# Altium PCB V1 RING BAND.PcbDoc
Units mil, origin at the board's own origin, x right, y up, seen from the top; angles counter-clockwise.
Board outline 1102.36 x 354.33 mil, 2 copper layers (Top Layer, Bottom Layer), stack 13.315 mil thick; 15 components, 12 nets, 52 pads, 16 vias.
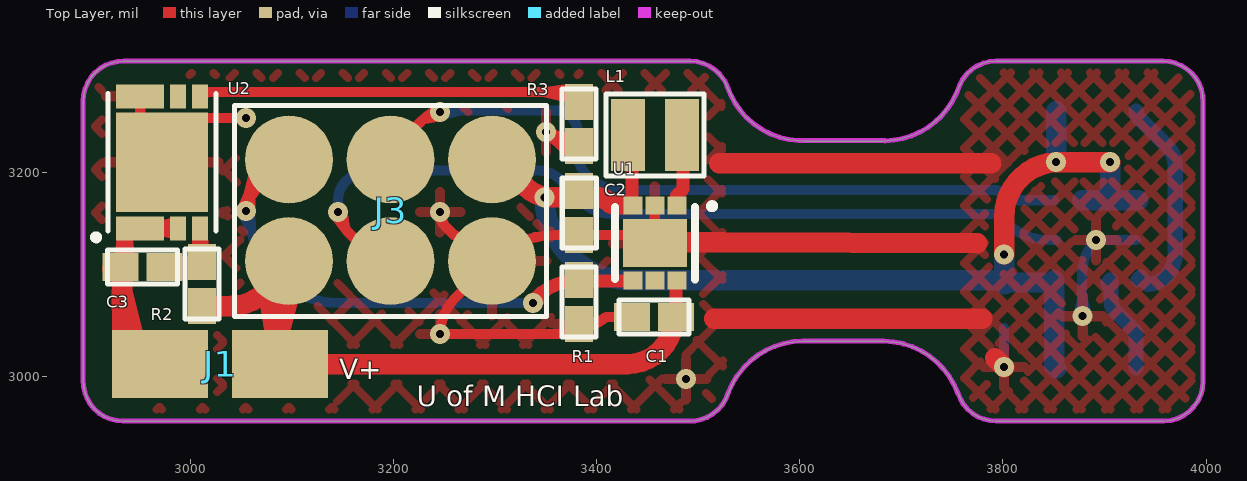
[diagram p0: Top Layer view]
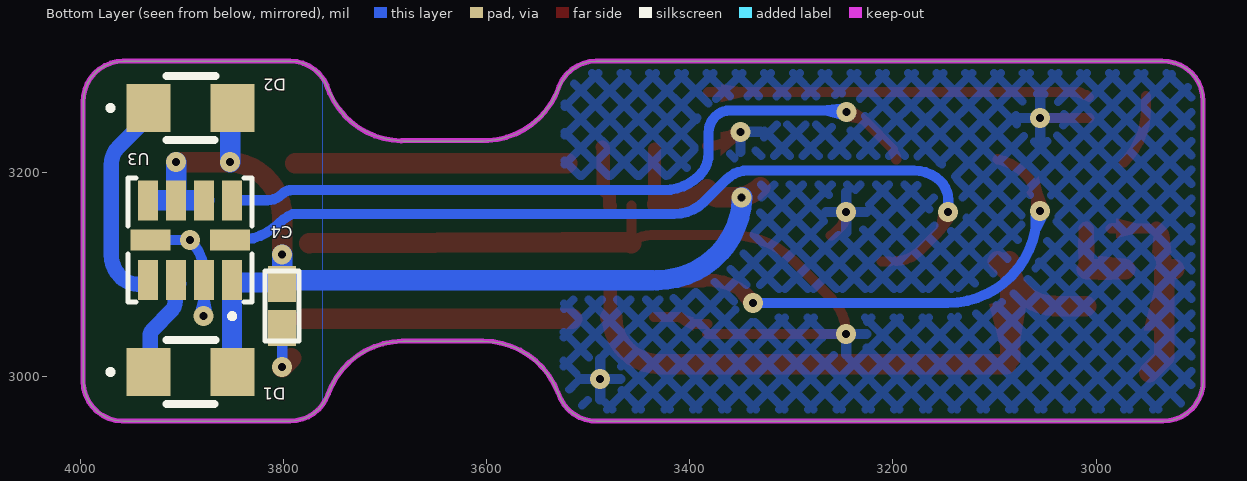
[diagram p1: Bottom Layer view, seen from below]
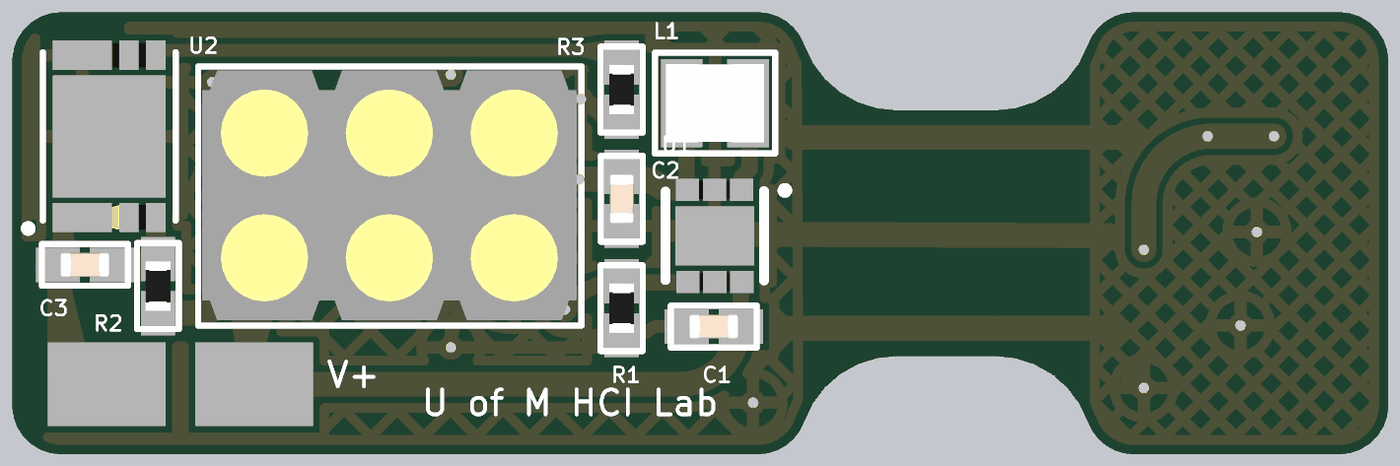
[diagram p2: 3D render of the assembled board from above, using the file's embedded part models]

## Layer stack, top to bottom
Top Coverlay: solder mask 1.9685, Polyimide, Dk 3
Top Layer: signal copper 1.378
Dielectric 2: core 4, Composite dielectric, Dk 4.014
Dielectric 1: core 2.5591, Composite dielectric, Dk 4.014
Dielectric 3: core 4, Composite dielectric, Dk 4.014
Bottom Layer: signal copper 1.378
Bottom Solder: solder mask 1.9685, Polyimide, Dk 3

## Board outline
2894.68,2995.08 2895.67,2986.32 2898.58,2978 2903.27,2970.53 2909.51,2964.3 2916.97,2959.61 2925.29,2956.7 2934.05,2955.71 3491.99,2955.71 3500.01,2956.53 3507.7,2958.98 3514.72,2962.93 3520.79,2968.24 3525.66,2974.67 3529.11,2981.96 3536.01,2996.53 3545.74,3009.39 3557.89,3020 3571.94,3027.91 3587.3,3032.8 3603.35,3034.45 3682.09,3034.45 3698.13,3032.8 3713.5,3027.91 3727.55,3020 3739.69,3009.39 3749.42,2996.53 3756.32,2981.96 3759.78,2974.67 3764.64,2968.24 3770.71,2962.93 3777.74,2958.98 3785.42,2956.53 3793.44,2955.71 3957.68,2955.71 3966.44,2956.7 3974.76,2959.61 3982.22,2964.3 3988.46,2970.53 3993.15,2978 3996.06,2986.32 3997.05,2995.08 3997.05,3270.67 3996.06,3279.43 3993.15,3287.75 3988.46,3295.22 3982.22,3301.45 3974.76,3306.14 3966.44,3309.05 3957.68,3310.04 3793.44,3310.04 3785.42,3309.21 3777.74,3306.77 3770.71,3302.81 3764.64,3297.51 3759.78,3291.08 3756.32,3283.79 3749.42,3269.22 3739.69,3256.36 3727.55,3245.75 3713.5,3237.84 3698.13,3232.95 3682.09,3231.3 3603.35,3231.3 3587.3,3232.95 3571.94,3237.84 3557.89,3245.75 3545.74,3256.36 3536.01,3269.22 3529.11,3283.79 3525.66,3291.08 3520.79,3297.51 3514.72,3302.81 3507.7,3306.77 3500.01,3309.21 3491.99,3310.04 2934.05,3310.04 2925.29,3309.05 2916.97,3306.14 2909.51,3301.45 2903.27,3295.22 2898.58,3287.75 2895.67,3279.43 2894.68,3270.67
board region "Layer Stack Region 1": 3524.62,2973.29 3520.79,2968.24 3514.72,2962.93 3507.7,2958.98 3500.01,2956.53 3491.99,2955.71 2934.05,2955.71 2925.29,2956.7 2916.97,2959.61 2909.51,2964.3 2903.27,2970.53 2898.58,2978 2895.67,2986.32 2894.68,2995.08 2894.68,3270.67 2895.67,3279.43 2898.58,3287.75 2903.27,3295.22 2909.51,3301.45 2916.97,3306.14 2925.29,3309.05 2934.05,3310.04 3491.99,3310.04 3500.01,3309.21 3507.7,3306.77 3514.72,3302.82 3520.79,3297.51 3522.73,3294.95
board region "Layer Stack Region 1": 3761.81,2971.97 3759.77,2974.67 3756.32,2981.95 3749.42,2996.53 3739.69,3009.39 3727.55,3020 3713.5,3027.91 3698.13,3032.8 3682.09,3034.45 3603.35,3034.45 3587.3,3032.8 3571.94,3027.91 3557.89,3020 3545.74,3009.39 3536.01,2996.53 3529.11,2981.95 3525.66,2974.67 3524.62,2973.29 3522.73,3294.95 3525.66,3291.08 3529.11,3283.79 3536.01,3269.22 3545.74,3256.36 3557.89,3245.75 3571.94,3237.84 3587.3,3232.95 3603.35,3231.3 3682.09,3231.3 3698.13,3232.95 3713.5,3237.84 3727.55,3245.75 3739.69,3256.36 3749.42,3269.22 3756.32,3283.79 3759.77,3291.08 3761.86,3293.83
board region "Layer Stack Region 1": 3761.86,3293.83 3764.64,3297.51 3770.71,3302.82 3777.74,3306.77 3785.42,3309.21 3793.44,3310.04 3957.68,3310.04 3966.44,3309.05 3974.76,3306.14 3982.22,3301.45 3988.46,3295.22 3993.15,3287.75 3996.06,3279.43 3997.05,3270.67 3997.05,2995.08 3996.06,2986.32 3993.15,2978 3988.46,2970.53 3982.22,2964.3 3974.76,2959.61 3966.44,2956.7 3957.68,2955.71 3793.44,2955.71 3785.42,2956.53 3777.74,2958.98 3770.71,2962.93 3764.64,2968.24 3761.81,2971.98

## Design rules (kind name [scope] priority, off if disabled: settings)
Clearance "Polygon Clearance" [InNet('GND')] p1: gap=5 ignorepadtopadclearanceinfootprint=TRUE except(0: Arc-Hole Track-Hole SMDPad-Hole THPad-Hole Via-Hole Fill-Hole Poly-Hole Region-Hole Text-Hole)
Clearance [All] p2: gap=2.36 ignorepadtopadclearanceinfootprint=TRUE except(0: Arc-Hole Track-Hole SMDPad-Hole THPad-Hole Via-Hole Fill-Hole Poly-Hole Region-Hole Text-Hole)
DiffPairsRouting [All] p1: maxlimit=10 minlimit=10 mostfreqgap=10 toplayer_minwidth=15 toplayer_maxwidth=15 toplayer_prefwidth=15 bottomlayer_minwidth=15 bottomlayer_maxwidth=15 bottomlayer_prefwidth=15 substack1={04ABB899-E476-4668-BCAF-80064BE25465} toplayer_{04abb899-e476-4668-bcaf-80064be25465}_minwidth=15 toplayer_{04abb899-e476-4668-bcaf-80064be25465}_maxwidth=15 toplayer_{04abb899-e476-4668-bcaf-80064be25465}_prefwidth=15 bottomlayer_{04abb899-e476-4668-bcaf-80064be25465}_minwidth=15 bottomlayer_{04abb899-e476-4668-bcaf-80064be25465}_maxwidth=15 bottomlayer_{04abb899-e476-4668-bcaf-80064be25465}_prefwidth=15 substack2={A03D15EE-9397-4E2F-9978-5E8F5CE2E8C2} toplayer_{a03d15ee-9397-4e2f-9978-5e8f5ce2e8c2}_minwidth=15 toplayer_{a03d15ee-9397-4e2f-9978-5e8f5ce2e8c2}_maxwidth=15 toplayer_{a03d15ee-9397-4e2f-9978-5e8f5ce2e8c2}_prefwidth=15 bottomlayer_{a03d15ee-9397-4e2f-9978-5e8f5ce2e8c2}_minwidth=15 bottomlayer_{a03d15ee-9397-4e2f-9978-5e8f5ce2e8c2}_maxwidth=15 bottomlayer_{a03d15ee-9397-4e2f-9978-5e8f5ce2e8c2}_prefwidth=15 maxuncoupledlength=500
PolygonConnect [All] p1: connectstyle=Relief reliefconductorwidth=10 reliefentries=4 polygonreliefangle="90 Angle" airgapwidth=10
RoomDefinition "[1] - RING BAND" [InComponentClass('[1] - RING BAND')] p1: confinementstyle=ConfineIn formatcopy=TRUE lockcomponents=FALSE outline 4340.55,3000 5975,3000 5975,3395 4340.55,3395
RoutingVias [All] p1: holewidth=5.91 width=13.78 viastyle="Through Hole" minholewidth=5.91 minwidth=13.78 maxholewidth=28 maxwidth=50
SolderMaskExpansion [All] p1: expansion=0.98 istentingtop=FALSE
Width [All] p1: maxlimit=30 minlimit=10 preferedwidth=10 substack1={04ABB899-E476-4668-BCAF-80064BE25465} toplayer_{04abb899-e476-4668-bcaf-80064be25465}_maxwidth=10 bottomlayer_{04abb899-e476-4668-bcaf-80064be25465}_maxwidth=10 substack2={A03D15EE-9397-4E2F-9978-5E8F5CE2E8C2} toplayer_{a03d15ee-9397-4e2f-9978-5e8f5ce2e8c2}_maxwidth=10 bottomlayer_{a03d15ee-9397-4e2f-9978-5e8f5ce2e8c2}_maxwidth=10
29 further rules are at their usual default settings.

## Classes and differential pairs
component class "[1] - RING BAND": C1 C2 C3 C4 D1 D2 J1 L1 R1 R2 R3 U1 U2 U3

## Components (designator, comment, footprint, x,y, rotation, side; value= is the part's Value field where it differs from the comment)
C1 "Cap" "0402 Capacitor" 3456.69,3058.07 r0 top value="10uF 10V 0402"
C2 "Cap" "0402 Capacitor" 3383,3160.5 r90 top value="22uF 6.3V 0402"
C3 "Cap" "0402 Capacitor" 2953,3107.5 r0 top value="0.1uF 10V 0402"
C4 "Cap" "0402 CAP BOT" 3801.18,3068.9 r270 top value="1uF 10V 0402"
D1 "LT M673-P2R1-25-Z" "LT M673-P2R1-25-Z" 3891.5,3004 r0 top
D2 "LT M673-P2R1-25-Z" "LT M673-P2R1-25-Z" 3891.5,3264 r0 top
J1 "LIPO" LIPO 3029.53,3011.81 r270 top
J3 "419-10-206-30-054000" 419-10-206-30-007000 3197.24,3163.19 r0 top
L1 "VLS201612CX-100M-1" VLS201612CX-100M-1 3457.68,3237.2 r180 top value=10uH
R1 "Res1" "0402 RESISTOR" 3382.87,3072.83 r270 top value="100K 1% 0402"
R2 "Res1" "0402 RESISTOR" 3011.5,3090.5 r90 top value="330 1% 0402"
R3 "Res1" "0402 RESISTOR" 3382.87,3248.03 r90 top value="2.7K 1% 0402"
U1 "XC9265A301MR-G" XC9265A3014R-G 3457.57,3130.8 r0 top
U2 "AP9214L-AN-HSB-7DICT-ND" AP9214L-AN-HSB-7DICT-ND 2972.5,3210.5 r0 top
U3 "BH1790GLC-E2" BH1790GLC-E2 3891.73,3133.86 r90 top

## Footprints (in the part's own frame and the unit in brackets; to place one, negate y for a bottom-side part, rotate by r counter-clockwise, add the part's x,y. Pads: shape width x height; smd on the part's side, far side on the other; paste and mask are expansions set on the pad)
"0402 CAP BOT" [mm]
  rect 0.9x0.7 smd far side mask-2: 1(-0.55,0) 2(0.55,0)
  body extent -0.51,-0.25 0.51,0.25, height 0.52
"0402 Capacitor" [mm]
  rect 0.9x0.7 smd mask-2: 1(-0.55,0) 2(0.55,0)
  silkscreen extent -0.87,-0.43 0.87,0.43, body extent -0.51,-0.25 0.51,0.25, height 0.52
"0402 RESISTOR" [mm]
  rect 0.9x0.7 smd mask-2: 1(-0.55,0) 2(0.55,0)
  silkscreen extent -0.87,-0.43 0.87,0.43, body extent -0.51,-0.25 0.51,0.25, height 0.36
419-10-206-30-007000 [mm]
  round 2.2 smd mask-0.1: 1(-2.54,1.27) 2(-2.54,-1.27) 3(0,1.27) 4(0,-1.27) 5(2.54,1.27) 6(2.54,-1.27)
  silkscreen extent -3.9,-2.65 3.9,2.63, body extent -3.82,-2.54 3.8,2.54, height 4.26
AP9214L-AN-HSB-7DICT-ND [mm]
  rect 1.2x0.6 smd mask-2: 1(-0.55,-1.65) 6(-0.55,1.65)
  rect 0.4x0.6 smd mask-2: 2(0.4,-1.65) 3(0.95,-1.65) 4(0.95,1.65) 5(0.4,1.65)
  rect 2.3x2.49 smd mask-4: 7(0,0)
  silkscreen extent -1.7,-1.92 1.35,1.71, body extent -1.27,-1.78 1.28,1.78, height 0.6
BH1790GLC-E2 [mm]
  rect 1x0.5 smd far side mask-0.05: 1(-0.995,1.05) 2(-0.995,0.35) 3(-0.995,-0.35) 4(-0.995,-1.05) 6(0.995,-1.05) 7(0.995,-0.35) 8(0.995,0.35) 9(0.995,1.05)
  rect 0.52x1 smd far side mask-0.05: 5(0,-0.995) 10(0,0.995)
  body extent -1.48,-1.48 1.48,1.48, height 1
LIPO [mm]
  rect 1.7x2.4 smd mask-2: 1(0,1.5) 2(0,-1.5)
"LT M673-P2R1-25-Z" [mm]
  rect 1.1x1.2 smd far side mask-2: 1(-1.05,0) 2(1.05,0)
  body extent -1.1,-0.7 1.1,0.7, height 1.3
VLS201612CX-100M-1 [mm]
  rect 0.85x1.8 smd mask-1: 1(-0.675,0) 2(0.675,0)
  silkscreen extent -1.22,-1.02 1.22,1.02, body extent -1,-0.8 1,0.8, height 1.19
XC9265A3014R-G [mm]
  rect 0.475x0.45 smd mask-1: 1(0.545,0.937) 2(-0.005,0.937) 3(-0.555,0.937) 4(-0.55,-0.938) 5(0,-0.938) 6(0.55,-0.938)
  rect 1.6x1.2 smd mask-2: 7(0,0)
  silkscreen extent -1,-0.91 1.48,0.97, body extent -0.9,-1 0.9,1, height 0.3

## Part data
C1 C2 C3 C4: "Capacitor", LatestRevisionDate=17-Jul-2002, LatestRevisionNote="Re-released for DXP Platform.", PackageDescription="Radial Cap, Thru-Hole; 2 Leads; 0.3 in Pin Spacing", PackageReference=RAD-0.3, Published=8-Jun-2000, Publisher="Altium Limited"
  C1: Digikey PN=1276-1450-1-ND
  C2: Digikey PN=1276-7090-1-ND
  C3: Digikey PN=1276-1022-1-ND
  C4: Digikey PN=1276-1076-1-ND
D1 D2: library part LED1, "Typical RED GaAs LED", Digikey PN=475-2775-1-ND, LatestRevisionDate=08-Jul-2005, LatestRevisionNote="Mech Layer 1 removed.", PackageDescription="LED; 2 Leads", PackageReference=LED-1, Published=8-Jun-2000, Publisher="Altium Limited"
J3: library part 419-10-206-30-007000, Digikey PN=ED10787-ND
L1: library part Inductor, "Inductor", Code_IEC=1005, Code_JEITA=0402, Digikey PN=445-172958-1-ND, LatestRevisionDate=29-May-2009, LatestRevisionNote="IPC-7351 Footprint Added.", PackageDescription="Chip Inductor", PackageReference=0402-A, Published=8-Jun-2000, Publisher="Altium Limited"
R1 R2 R3: "Resistor", LatestRevisionDate=17-Jul-2002, LatestRevisionNote="Re-released for DXP Platform.", PackageDescription="Axial Device, Thru-Hole; 2 Leads; 0.3 in Pin Spacing", PackageReference=AXIAL-0.3, Published=8-Jun-2000, Publisher="Altium Limited"
  R1: Digikey PN=311-100KLRCT-ND
  R2: Digikey PN=311-330LRCT-ND
  R3: Digikey PN=311-2.70KLRCT-ND
U1: library part XC9265A3014R-G
U2: Digikey PN=AP9214L-AN-HSB-7DICT-ND
U3: Digikey PN=BH1790GLC-E2CT-ND

## Via types
v1: diameter 19.68, hole 7.87, Top Layer to Bottom Layer, tented both sides, 16 vias

## Nets (pads, with @x,y where several pads share a name; then routed paths per layer and width w, separated by ;. In a path a pad name is that pad's centre, name@x,y a point inside that pad or via, vN(x,y) a via of type N, cw(c..) or ccw(c..) an arc to the next point about the centre after c; other vN are vias at no path point)
GND: C1.1 C2.1 C4.2 J3.6 R1.2 R3.1 U1.2 U1.7 U2.6 U2.7 U3.2 U3.5 | length 1708.2
  Top Layer w10: U2.6 2950.85,3262.78 ccw(c3024.78,3262.78) U2.7 ; v1(3055.12,3253.94) 3023.45,3253.94 ; v1(3246.06,3161.42) 3246.06,3159.42 ccw(c3262.92,3159.42) 3251,3147.5 3258.94,3139.56 ccw(c3261.5,3142.12) 3261.5,3138.5 ; v1(3350.25,3240.5) 3351.29,3239.46 ccw(c3382.87,3271.04) R3.1 ; R1.2@3382.87,3041.34 v1(3246.06,3041.34) cw(c3295.96,3041.34) 3260.68,3076.62 J3.6 cw(c3359.19,3051.25) 3359.19,3138.85 C2.1 3438.16,3138.85 cw(c3438.16,3111.39) U1.7@3457.38,3131 ; R1.2 3394.16,3051.18 ccw(c3394.16,3069.34) 3407,3056.5 cw(c3410.79,3052.71) 3410.79,3058.07 C1.1 ; U1.2 U1.7@3457.38,3131 ; U1.7 U1.7@3457.38,3131 ; 3023.45,3253.94 3006.89,3253.94 3023.45,3253.94
  Top Layer w20: U1.7 cw(c3460.2,3128.18) 3460.2,3131.89 3524.61,3131.89 3774.61,3130.85 ; 3515.75,3056.59 3779.53,3056.59 ; 3520.67,3209.65 3788.39,3209.65 ; 3792.23,3017.81 v1(3801.18,3008.86)
  Bottom Layer w10: v1(3801.18,3008.86) C4.2 ; v1(3878.5,3059) 3879.5,3059 cw(c3883.24,3062.74) 3877.95,3062.74 U3.2 3877.95,3100.59 cw(c3925,3100.59) v1(3891.73,3133.86) U3.5
  other v1: 3488.19,2997.05
LED1_SINK: D1.2 U3.3 | length 100.9
  Bottom Layer w15: U3.3@3902.86,3090.86 U3.3 cw(c3903.13,3092.3) 3906.5,3092.3 3906.5,3073.66 ccw(c3920.16,3073.66) 3910.5,3064 3928.5,3046 cw(c3922.22,3039.72) 3931.1,3039.72 D1.2@3931.1,3007.87
LED2_SINK: D2.2 U3.4 | length 203
  Bottom Layer w15: D2.2@3931.1,3260.83 ccw(c3940.61,3260.83) 3933.89,3254.11 3961.87,3226.12 cw(c3943.45,3207.7) 3969.5,3207.7 3969.5,3119.73 cw(c3938.77,3119.73) 3960.5,3098 3960.07,3097.57 cw(c3943,3114.64) 3943,3090.5 ; U3.4 U3.4@3935.76,3097.37
NetC3_1: C3.1 J1.2 U2.1 U2.2 | length 198.6
  Top Layer w10: U2.1@2948.35,3145.46 U2.2@2985.75,3145.46
  Top Layer w15: C3.1@2927.17,3105.31 2933.44,3111.59 2933.44,3115.53 2935.69,3117.78 2935.69,3139.84 U2.1@2940.53,3144.68
  Top Layer w20: C3.1@2923.23,3105.31 2927.17,3105.31 2931.26,3105.31 2933.07,3103.5 2933.07,3018.7 J1.2@2947.83,3003.94
NetC3_2: C3.2 R2.2 U2.3 | length 80
  Top Layer w10: R2.2@3008.18,3105.1 3008.39,3105.3 R2.2@3009.37,3106.29
  Top Layer w15: R2.2@3009.37,3105.3 3009.84,3105.3 U2.3@3009.84,3144.68
  Top Layer w20: C3.2@2971.13,3105.3 3008.39,3105.3 R2.2@3009.37,3105.3 ; C3.2@2972.11,3105.1 C3.2@2972.11,3105.3
NetL1_1: L1.1 U1.1 | length 61.7
  Top Layer w13: U1.1@3478.15,3167.32 3478.64,3167.32 U1.1 3479.03,3177.85 3485.24,3184.05 3485.24,3224.41 L1.1@3486.22,3225.39
NetR3_2: R3.2 U2.4 | length 373.7
  Top Layer w10: U2.4@3007.24,3274.57 U2.4@3009.38,3276.7 ; U2.4@3011.98,3276.74 cw(c3018.7,3270.02) 3018.7,3279.53 R3.2@3381.89,3279.53
POWER_EN: J3.1 R1.1 U1.4 | length 507.7
  Top Layer w10: v1(3055.12,3162.4) cw(c3107.02,3162.4) 3096.86,3213.3 J3.1@3096.85,3213.39
  Top Layer w13: v1(3337.6,3071.85) cw(c3344.23,3071.85) 3339.54,3076.54 cw(c3382.87,3033.2) R1.1 ; R1.1@3387.3,3093.5 U1.4@3435.04,3093.5
  Bottom Layer w10: v1(3055.12,3162.4) 3058.58,3162.35 ccw(c3146.48,3159.79) 3146.48,3071.85 3146.55,3071.85 v1(3337.6,3071.85)
SCL1: J3.4 U3.10 | length 839.6
  Top Layer w10: v1(3145.67,3161.42) 3146.86,3161.42 3147.71,3160.57 ccw(c3174.35,3160.57) 3155.51,3141.73 3174.74,3122.5 ccw(c3196.85,3144.75) J3.4@3196.85,3113.39 ; J3.4@3202.95,3112.8 J3.4@3211.02,3112.8
  Bottom Layer w10: v1(3145.67,3161.42) 3145.67,3173.8 cw(c3170.7,3173.8) 3153,3191.5 cw(c3179.56,3164.94) 3179.56,3202.5 3342.27,3202.5 cw(c3342.27,3171.77) 3364,3193.5 3385.68,3171.82 3385.73,3171.77 ccw(c3415.47,3201.5) 3415.47,3159.45 3415.53,3159.45 3790.84,3159.45 cw(c3774.8,3120.73) 3804.47,3150.33 ccw(c3844.29,3190.22) 3844.29,3133.86 U3.10
SDA1: J3.3 U3.9 | length 726.6
  Top Layer w10: J3.3@3196.85,3213.39 cw(c3206.35,3213.39) J3.3@3199.63,3220.11 ; J3.3@3200.13,3223.61 3227.4,3250.87 cw(c3246.5,3231.85) v1@3246,3258.8 ; v1@3246,3255.3 v1@3246,3258.8 ; v1(3246,3260) v1@3246,3258.8 ; v1@3246.5,3258.8 ccw(c3246.5,3231.85) v1@3246,3258.8
  Bottom Layer w10: v1@3246,3256.62 v1(3246,3260) ; v1@3253.91,3261.5 3360.5,3261.5 cw(c3360.5,3240.98) 3375.01,3255.49 cw(c3359.34,3239.82) 3381.5,3239.82 3381.5,3219.23 ccw(c3412.23,3219.23) 3390.5,3197.5 ccw(c3425.33,3232.33) 3425.33,3183.07 3791.68,3183.07 cw(c3791.68,3169.63) 3801.18,3179.13 ccw(c3815.91,3193.87) 3815.91,3173.03 U3.9
Vbat: C1.2 J1.1 J3.2 R2.1 U1.6 | length 653.1
  Top Layer w13: C1.2@3475.07,3059.82 3478.35,3063.1 U1.6@3478.35,3093.5
  Top Layer w20: R2.1@3009.84,3068.9 3041.34,3068.9 3041.54,3069.29 ccw(c3041.54,3113.39) J3.2@3085.63,3113.39 ; J1.1@3084.65,3017.72 3084.65,3101.18 3091.24,3107.78 J3.2@3096.85,3113.39 ; J1.1 3430.12,3011.81 ccw(c3430.12,3058.07) 3476.38,3058.07 C1.2
VCC_3V: C2.2 C4.1 D1.1 D2.1 J3.5 L1.2 U1.3 U3.1 U3.6 U3.7 U3.8 | length 1143.2
  Top Layer w13: U1.3@3434.84,3167.32 3434.84,3168.43 L1.2@3434.84,3223.62
  Top Layer w20: J3.5@3330.71,3186.02 ccw(c3354.47,3209.79) 3354.47,3176.18 3373.03,3176.18 ccw(c3373.03,3180.93) 3376.39,3177.57 3382.87,3184.05 3384.48,3182.44 ccw(c3399.61,3197.57) 3399.61,3176.18 cw(c3399.61,3157.17) 3413.05,3170.61 ccw(c3416.24,3173.8) 3416.24,3169.29 U1.3@3431.91,3169.29 ; v1(3801.18,3119.67) 3801.18,3156.65 3801.18,3156.74 cw(c3855.15,3156.74) v1(3852.36,3210.63) v1(3905.51,3210.63)
  Bottom Layer w20: v1@3348.43,3176.18 ccw(c3432.37,3178.47) 3432.37,3094.49 ; 3437.29,3094.49 3797.4,3094.49 3801.18,3090.71 C4.1 ; C4.1@3801.18,3092.11 3849.15,3092.11 3850.39,3093.35 U3.1 3850.5,3094.58 3850.5,3009.74 D1.1@3852.36,3007.87 ; C4.1@3801.18,3092.93 v1(3801.18,3119.67) ; v1(3852.36,3210.63) D2.1@3852.36,3260.83 ; U3.8 U3.7 ; v1(3905.51,3210.63) U3.7 ; U3.6 U3.7
  other v1: 3349,3176
pads on no net: U1.5 U2.5

## Polygon pours and split planes (outlines as drawn)
GND on Bottom Layer "SEN_BOT" (hatched 45Degree grid 20 track 8, remove dead copper, shelved, pour order 14): 3761.27,3291.91 cw(c3767.1,3291.91) 3762.98,3296.03 3765.73,3298.78 cw(c3792.27,3272.41) 3792.27,3309.82 3956.3,3309.82 cw(c3956.31,3268.86) 3985.27,3297.82 cw(c3958.73,3271.27) 3996.27,3271.27 3996.27,2994.82 cw(c3957.66,2994.82) 3984.96,2967.51 3983.64,2966.19 cw(c3954.97,2998.31) 3952.53,2955.32 3793.74,2955.32 cw(c3793.74,2996.29) 3764.77,2967.32 3761.27,2971.32
GND on Bottom Layer "MAIN_BOT" (hatched 45Degree grid 20 track 8, remove dead copper, pour order 12): 2933.87,3310.88 ccw(c2933.39,3272.24) 2906.39,3299.88 ccw(c2933.85,3271.56) 2894.41,3271.11 2894.41,2996.89 ccw(c2935.32,2996.88) 2906.39,2967.95 ccw(c2934.33,2995.89) 2934.33,2956.38 3491.41,2956.38 ccw(c3492.11,2995.66) 3519.39,2967.39 3522.91,2971.88 ccw(c3519.29,2975.49) 3524.41,2975.5 3522.91,3295.41 ccw(c3491.66,3272.05) 3487.82,3310.87
GND on Top Layer "MAIN_TOP" (hatched 45Degree grid 30 track 8, remove dead copper, pour order 10): 2933.96,3310 ccw(c2933.49,3271.37) 2906.49,3299 ccw(c2933.94,3270.68) 2894.5,3270.23 2894.5,2996.01 ccw(c2935.42,2996.01) 2906.49,2967.07 ccw(c2934.43,2995.02) 2934.43,2955.5 3491.5,2955.5 ccw(c3492.2,2994.79) 3519.49,2966.51 3523,2971 ccw(c3519.39,2974.62) 3524.5,2974.62 3523,3294.54 ccw(c3491.75,3271.17) 3487.91,3310
GND on Top Layer "SEN_TOP" (hatched 45Degree grid 20 track 8, remove dead copper, pour order 13): 3762,3292.09 cw(c3767.83,3292.09) 3763.71,3296.21 3766.46,3298.96 cw(c3793,3272.58) 3793,3310 3957.03,3310 cw(c3957.03,3269.04) 3986,3298 cw(c3959.45,3271.45) 3997,3271.44 3997,2995 cw(c3958.38,2995) 3985.69,2967.69 3984.37,2966.37 cw(c3955.7,2998.48) 3953.26,2955.5 3794.47,2955.5 cw(c3794.47,2996.47) 3765.5,2967.5 3762,2971.5

## Keep-outs
Keep-Out Layer:
  lines w5: 3490.22,2955.71 2934.06,2955.71 cw(c2934.06,2995.08) 2894.7,2996.09 2894.7,3270.66 cw(c2934.06,3270.67) 2935.06,3310.03 3492.11,3310.03 ; 3490.24,2955.68 ccw(c3491.95,2995.02) 3529.53,2983.27 ; 3492.13,3310.04 cw(c3492.13,3270.67) 3528.55,3285.61 ; 3528.54,3285.43 ccw(c3603.22,3310.4) 3598.68,3231.79 3683.79,3231.79 ; 3529.8,2983.83 cw(c3603.35,2955.71) 3603.35,3034.45 3683.07,3034.45 cw(c3681.84,2955.72) 3755.87,2982.52 ; 3684.03,3231.55 ccw(c3682.39,3310.28) 3757.49,3286.61 ; 3755.98,2982.56 ccw(c3793.31,2995.08) 3793.31,2955.71 3958.66,2955.71 ccw(c3957.75,2995.07) 3997.12,2995.07 3997.12,3269.6 ; 3757.33,3286.66 cw(c3793.31,3270.67) 3793.31,3310.04 3957.68,3310.04 cw(c3957.68,3270.67) 3997.04,3269.69

## Silkscreen, mask and mechanical layers (free items; w line width, h text height)
Top Overlay:
  text "V+" at 3147,2997 h20
  text "U of M HCI Lab" at 3223,2970.5 h20
Stiffener:
  text "Stiffener BOT" at 3085.63,2812.01 h18
  text "No Stiffener" at 3537.4,2808.07 h18
  text "Stiffener TOP" at 3768.7,2808.07 h18

## Dimensions
3761.81,2886.81 to 3997.05,2886.81 on Stiffener
3524.61,2886.81 to 3761.81,2886.81 on Stiffener
2894.68,2886.81 to 3524.61,2886.81 on Stiffener